# Altium PCB RemotoXBee.PcbDoc
Units mil, origin at the board's own origin, x right, y up, seen from the top; angles counter-clockwise.
Board outline 6000 x 4000 mil, 2 copper layers (Top Layer, Bottom Layer); 24 components, 23 nets, 116 pads, 0 vias.
Unrouted connection lines stored in the file: 64.
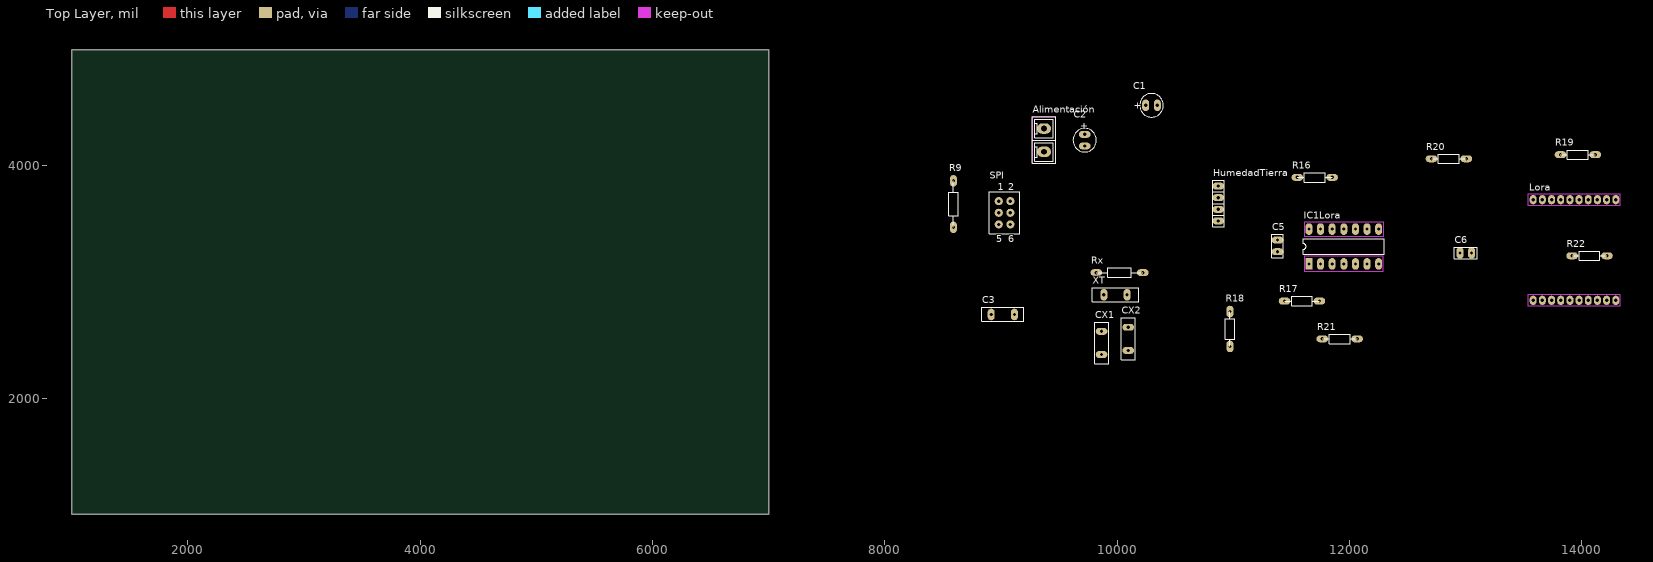
[diagram p0: Top Layer view]
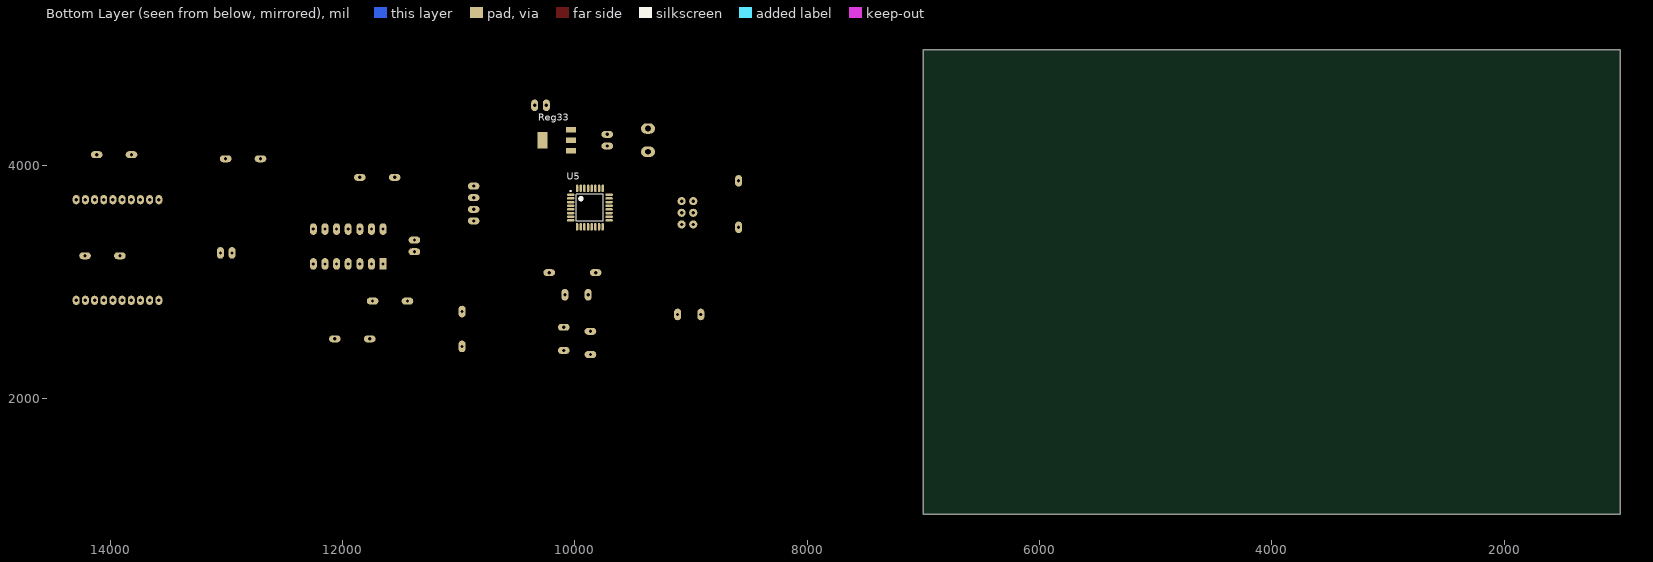
[diagram p1: Bottom Layer view, seen from below]

## Layer stack, top to bottom
Top Solder: solder mask 0.4, Solder Resist, Dk 3.5
Top Layer: signal copper 1.4
Dielectric 1: dielectric 12.6, FR-4, Dk 4.8
Bottom Layer: signal copper 1.4
Bottom Solder: solder mask 0.4, Solder Resist, Dk 3.5

## Board outline
1000,1000 7000,1000 7000,5000 1000,5000

## Design rules (kind name [scope] priority, off if disabled: settings)
Clearance [All] p1: gap=10
PolygonConnect [All] p1: connectstyle=Relief reliefconductorwidth=10 reliefentries=4 polygonreliefangle="90 Angle" airgapwidth=10
RoomDefinition RemotoXBee [InComponentClass('RemotoXBee')] p1: confinementstyle=ConfineIn formatcopy=TRUE lockcomponents=FALSE outline 8455,1935 14565,1935 14565,4725 8455,4725
RoutingLayers [All] p1: top layer_v5=FALSE bottom layer_v5=TRUE
RoutingVias [All] p1: holewidth=28 width=50 viastyle="Through Hole" minholewidth=28 minwidth=50 maxholewidth=28 maxwidth=50
SolderMaskExpansion [All] p1: expansion=4
Width [All] p1: maxlimit=10 minlimit=10 preferedwidth=10
29 further rules are at their usual default settings.

## Components (designator, comment, footprint, x,y, rotation, side; value= is the part's Value field where it differs from the comment)
Alimentación "CON2" "BORNERA2 - T" 9370,4120 r90 top
C1 "47uF" CAPPOL100 10245,4520 r0 top
C2 "100uF" CAPPOL100 9720,4270 r270 top
C3 "CAP" CAP200 9115,2720 r180 top
C5 "0,1uF" CAP100 11380,3260 r90 top
C6 "0,1uF" CAP100 13050,3250 r180 top
CX1 "22pF" CAP200 9865,2375 r90 top
CX2 "22pF" CAP200 10095,2410 r90 top
HumedadTierra "A-D-Gnd-Vcc" CON4 10870,3825 r270 top
IC1Lora "74HC125" DIP14B 11650,3155 r90 top
Lora "LORA BEE" LORABEE 13975,3275 r90 top
R9 "10K" RES400 8590,3470 r90 top
R16 "3k3" RES300 11550,3900 r0 top
R17 "3k3" RES300 11440,2835 r0 top
R18 "1K" RES300 10970,2745 r270 top
R19 "3k3" RES300 13815,4095 r0 top
R20 "3k3" RES300 12705,4060 r0 top
R21 "3k3" RES300 11765,2510 r0 top
R22 "2k2" RES300 14215,3225 r180 top
Reg33 "AMS1117-3.3" SOT223 10155,4220 r0 bottom
Rx "1M" RES400 9820,3080 r0 top
SPI "CON6" CON2X3 8980,3695 r0 top
U5 "ATmega328P-PU" 32A_N 9870,3640 r180 bottom
XT "XT" XT 9885,2890 r0 top

## Footprints (in the part's own frame and the unit in brackets; to place one, negate y for a bottom-side part, rotate by r counter-clockwise, add the part's x,y. Pads: shape width x height; smd on the part's side, far side on the other; paste and mask are expansions set on the pad)
32A_N [mm] "Thin QFP, 32-Leads, Body 7x7mm, Pitch 0.8mm, IPC Medium Density"
  oval 1.65x0.55 smd: 1(-4.2,2.8) 2(-4.2,2) 3(-4.2,1.2) 4(-4.2,0.4) 5(-4.2,-0.4) 6(-4.2,-1.2) 7(-4.2,-2) 8(-4.2,-2.8) 17(4.2,-2.8) 18(4.2,-2) 19(4.2,-1.2) 20(4.2,-0.4) 21(4.2,0.4) 22(4.2,1.2) 23(4.2,2) 24(4.2,2.8)
  oval 0.55x1.65 smd: 9(-2.8,-4.2) 10(-2,-4.2) 11(-1.2,-4.2) 12(-0.4,-4.2) 13(0.4,-4.2) 14(1.2,-4.2) 15(2,-4.2) 16(2.8,-4.2) 25(2.8,4.2) 26(2,4.2) 27(1.2,4.2) 28(0.4,4.2) 29(-0.4,4.2) 30(-1.2,4.2) 31(-2,4.2) 32(-2.8,4.2)
  silkscreen extent -4.33,-2.95 2.95,3.75, body extent -3.5,-3.5 3.5,3.5, height 1.2
"BORNERA2 - T" [mil] "Top Layer bloqueada"
  oval 90x120 hole 50: 1(0,0) 2(200,0)
  Top Layer keep-out region: -100,-100 300,-100 300,100 -100,100
  silkscreen extent -100,-100 300,100
CAP100 [mil]
  oval 60x100 hole 28: 1(0,0) 2(100,0)
  silkscreen extent -50,-50 150,50
CAP200 [mil]
  oval 60x100 hole 28: 1(0,0) 2(200,0)
  silkscreen extent -80,-60 280,60
CAPPOL100 [mil]
  oval 60x100 hole 28: 1(0,0) 2(100,0)
  silkscreen extent -51,-101 151,101
CON2X3 [mil]
  round 70 hole 28: 1(0,0) 2(100,0) 3(0,-100) 4(100,-100) 5(0,-200) 6(100,-200)
  silkscreen extent -80,-280 180,80
CON4 [mil]
  oval 60x100 hole 28: 1(0,0) 2(100,0) 3(200,0) 4(300,0)
  silkscreen extent -50,-50 350,50
DIP14B [mil] "DIP14 con top layer bloqueado"
  rect 100x60 hole 28: 1(0,0)
  oval 100x60 hole 28: 2(0,-100) 3(0,-200) 4(0,-300) 5(0,-400) 6(0,-500) 7(0,-600) 8(300,-600) 9(300,-500) 10(300,-400) 11(300,-300) 12(300,-200) 13(300,-100) 14(300,0)
  Top Layer keep-out region: 240,-645 360,-645 360,40 240,40
  Top Layer keep-out region: -65,-640 65,-640 65,40 -65,40
  silkscreen extent 85,-650 215,50
LORABEE [mil] "Top Layer Bloqueada"
  oval 80x60 hole 30: 1(-433,395) 2(-433,316) 3(-433,237) 4(-433,158) 5(-433,79) 6(-433,0) 7(-433,-79) 8(-433,-158) 9(-433,-237) 10(-433,-316) 11(433,-316) 12(433,-237) 13(433,-158) 14(433,-79) 15(433,0) 16(433,79) 17(433,158) 18(433,237) 19(433,316) 20(433,395)
  Top Layer keep-out region: -481,-355 -386,-355 -386,440 -481,440
  Top Layer keep-out region: 385,-355 480,-355 480,440 385,440
RES300 [mil]
  oval 100x60 hole 28: 1(0,0) 2(300,0)
  silkscreen extent 0,-40 300,40
RES400 [mil]
  oval 100x60 hole 28: 1(0,0) 2(400,0)
  silkscreen extent 0,-40 400,40
SOT223 [mil]
  rect 88x48 smd: 1(-122,91) 2(-122,0) 3(-122,-91)
  rect 86.61x141.73 smd: 4(122.01,0)
XT [mil]
  oval 60x100 hole 28: 1(0,0) 2(200,0)
  silkscreen extent -100,-60 300,60

## Part data
Alimentación: "Conector 2"
C1 C2: library part CAPPOL, "Capacitor Polarizado"
C3: "Capacitor"
C5 C6 CX1 CX2: library part CAP, "Capacitor"
HumedadTierra: library part CON4, "Conector 4"
R9 R16 R17 R18 R19 R20 R21 R22 Rx: library part RES, "Resistencia"
SPI: "Conector 6"
U5: "8-bit AVR Microcontroller, 32KB Flash, 1KB EEPROM, 2KB SRAM, 28-pin PDIP, Industrial Grade (-40°C to 85°C)"
XT: "Cristal de Quarzo"

## Nets (pads, with @x,y where several pads share a name; then routed paths per layer and width w, separated by ;. In a path a pad name is that pad's centre, name@x,y a point inside that pad or via, vN(x,y) a via of type N, cw(c..) or ccw(c..) an arc to the next point about the centre after c; other vN are vias at no path point)
3V3: C1.1 C5.2 C6.2 IC1Lora.14 Lora.1 Reg33.2
NetC3_2: C3.2 R9.1 SPI.5 U5.1
NetCX1_2: CX1.2 Rx.1 U5.10 XT.1
NetCX2_2: CX2.2 Rx.2 U5.9 XT.2
NetHumedadTierra_1: HumedadTierra.1 U5.23
NetHumedadTierra_2: HumedadTierra.2 U5.5
NetIC1Lora_1: IC1Lora.1 IC1Lora.6 IC1Lora.10 IC1Lora.13 Lora.17
NetIC1Lora_2: IC1Lora.2 R17.2
NetIC1Lora_3: IC1Lora.3 Lora.18
NetIC1Lora_5: IC1Lora.5 R21.2
NetIC1Lora_8: IC1Lora.8 SPI.1 U5.18
NetIC1Lora_9: IC1Lora.9 R20.1
NetIC1Lora_11: IC1Lora.11 Lora.11
NetIC1Lora_12: IC1Lora.12 R16.2
NetLora_4: Lora.4 R20.2
NetLora_5: Lora.5 R18.1 R22.2
NetLora_12: Lora.12 R19.2
NetR16_1: R16.1 SPI.4 U5.17
NetR17_1: R17.1 SPI.3 U5.19
NetR19_1: R19.1 U5.4
NetR21_1: R21.1 U5.16
SGND: Alimentación.1 C1.2 C2.2 C3.1 C5.1 C6.1 CX1.1 CX2.1 HumedadTierra.3 IC1Lora.4 IC1Lora.7 Lora.10 R22.1 Reg33.1 SPI.6 U5.8 U5.22
VCC: Alimentación.2 C2.1 HumedadTierra.4 R9.2 R18.2 Reg33.3 SPI.2 U5.6 U5.7 U5.20 U5.21
pads on no net: Lora.2 Lora.3 Lora.6 Lora.7 Lora.8 Lora.9 Lora.13 Lora.14 Lora.15 Lora.16 Lora.19 Lora.20 Reg33.4 U5.2 U5.3 U5.11 U5.12 U5.13 U5.14 U5.15 U5.24 U5.25 U5.26 U5.27 U5.28 U5.29 U5.30 U5.31 U5.32

## Text inside footprints (layer, text, board x,y; h text height)
C1: Top Overlay "+" at 10140,4490 h60
C2: Top Overlay "+" at 9690,4375 h60 r270
SPI: Top Overlay "2" at 9060,3790 h60; Top Overlay "1" at 8970,3790 h60; Top Overlay "5" at 8960,3340 h60; Top Overlay "6" at 9060,3340 h60